# Altium PCB ServersBlock.PcbDoc
Units mil, origin at the board's own origin, x right, y up, seen from the top; angles counter-clockwise.
Board outline 6000 x 4000 mil, 2 copper layers (Top Layer, Bottom Layer); 11 components, 13 nets, 84 pads, 0 vias.
Unrouted connection lines stored in the file: 30.
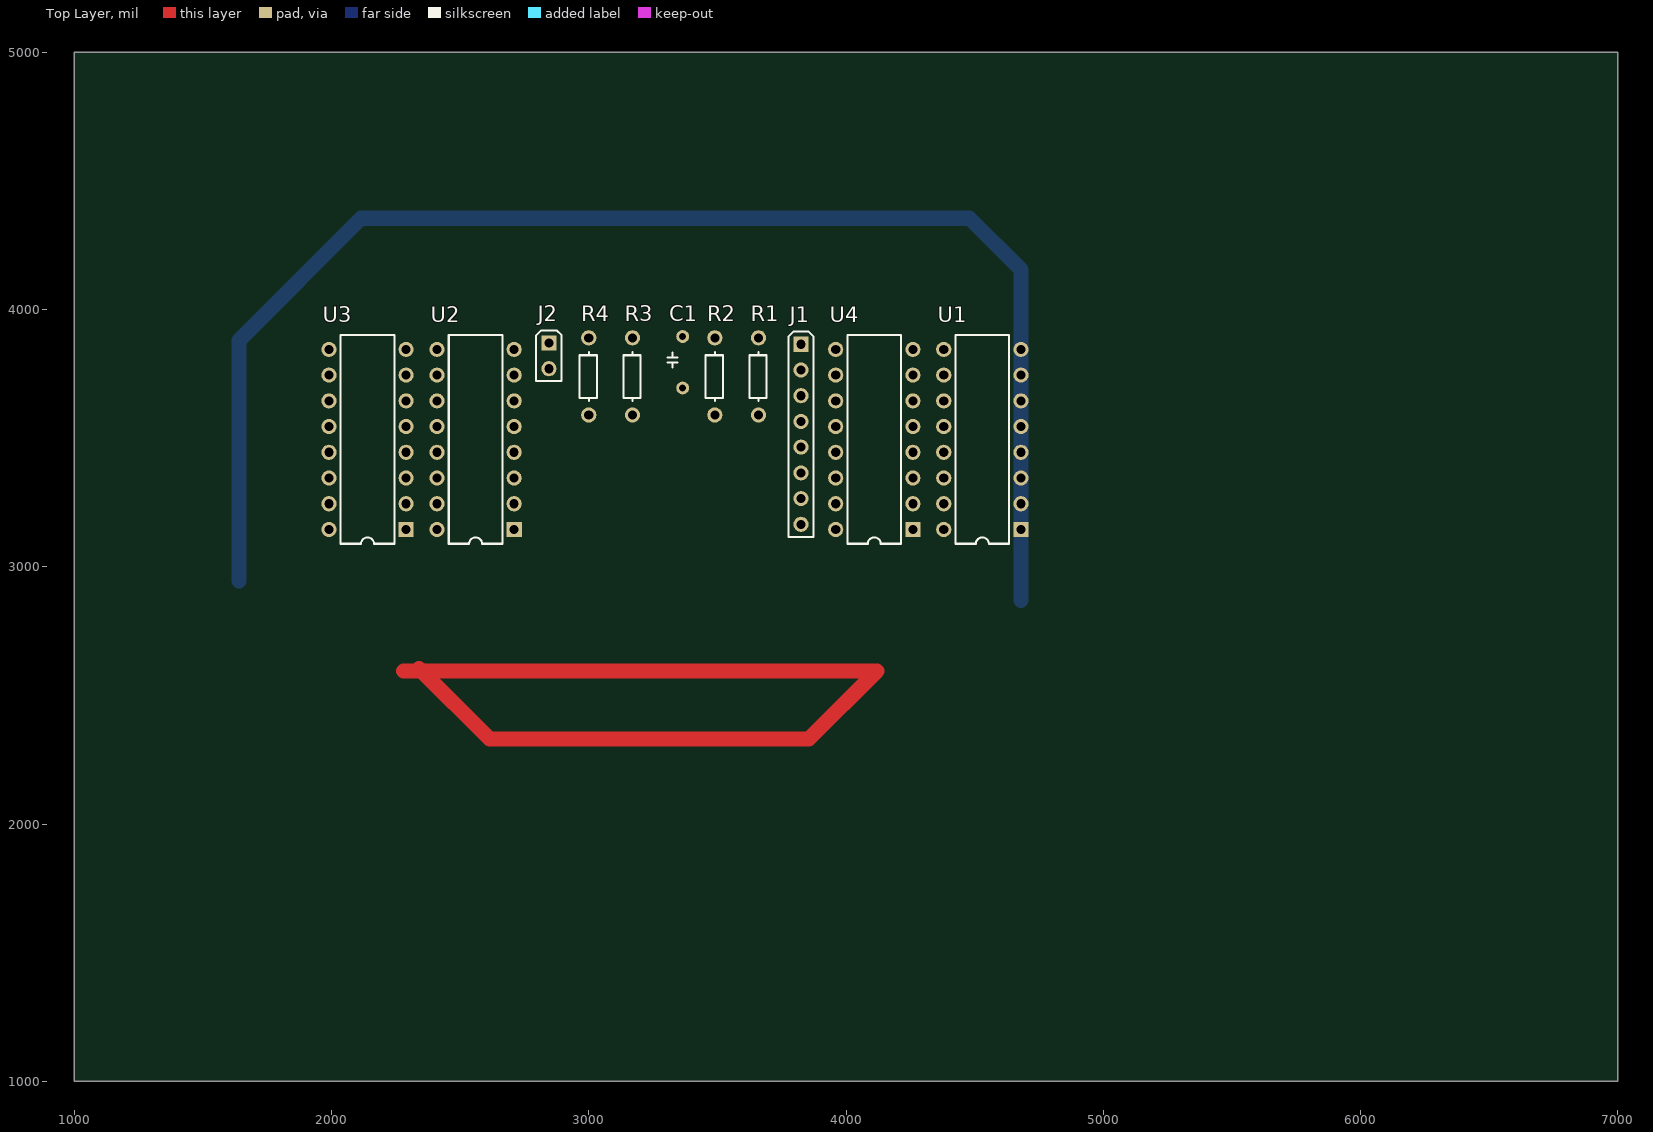
[diagram p0: Top Layer view]
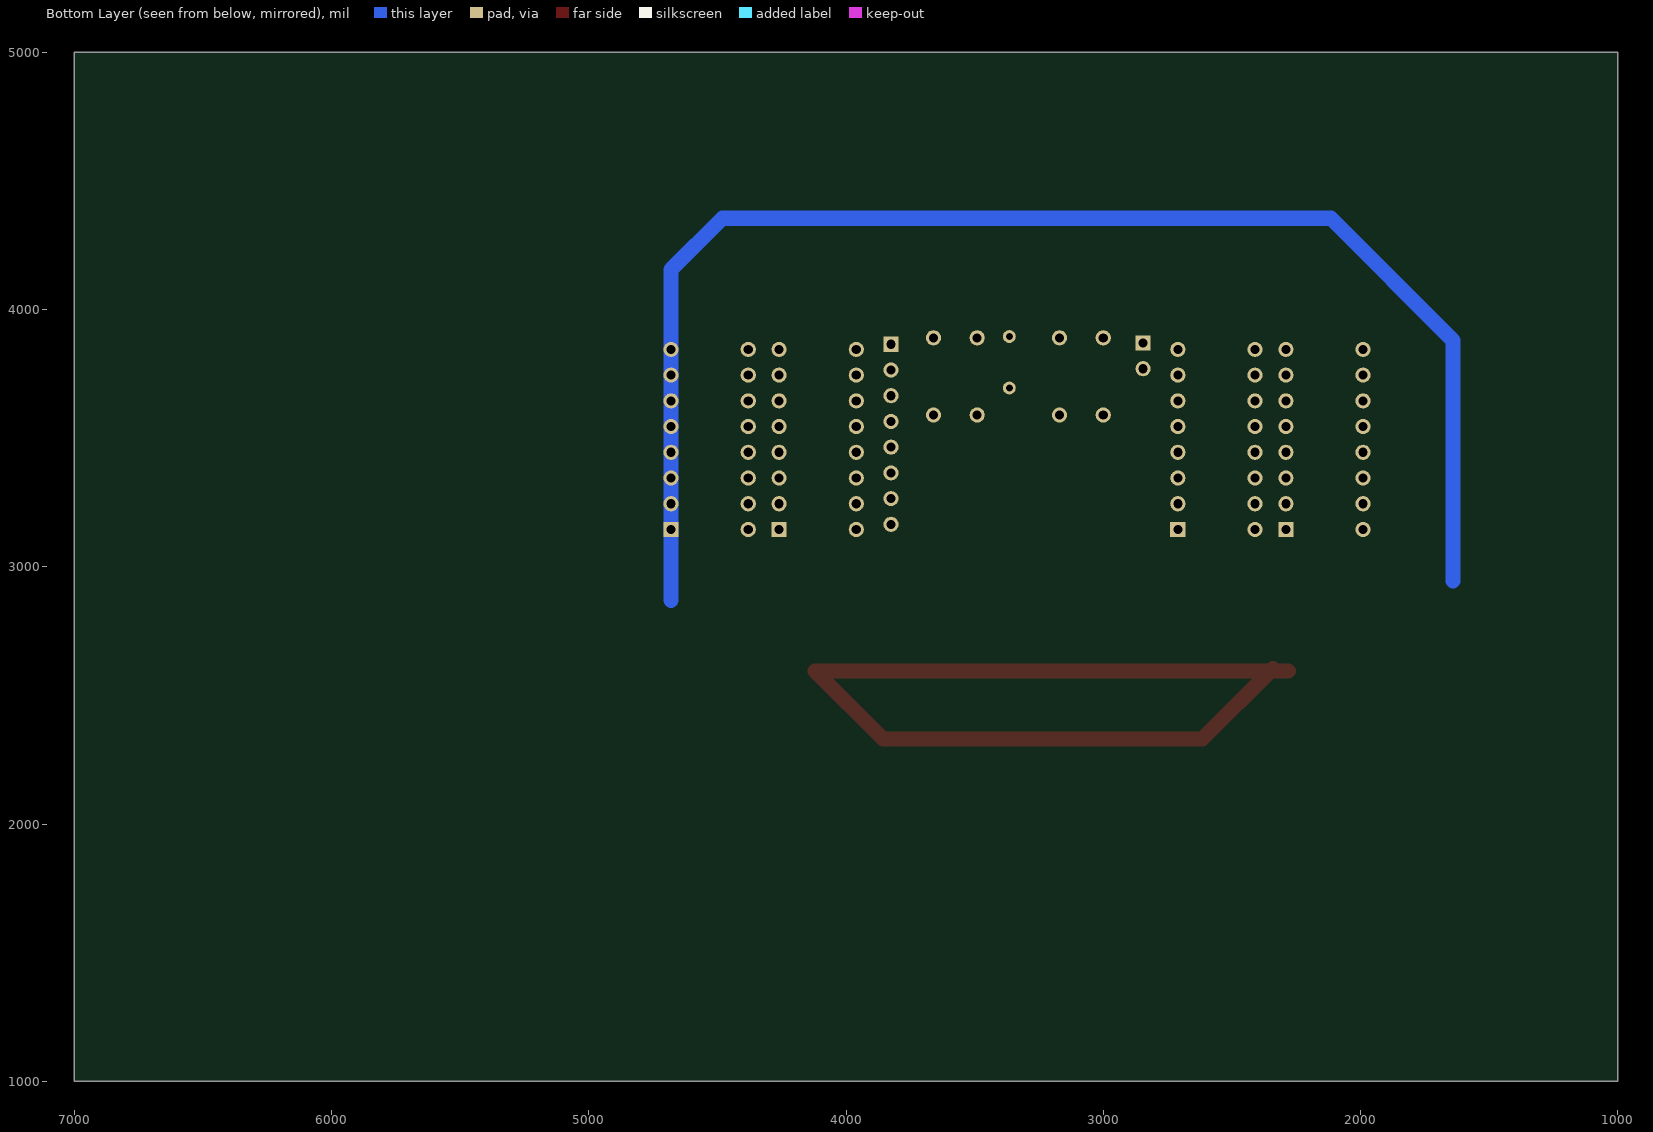
[diagram p1: Bottom Layer view, seen from below]

## Layer stack, top to bottom
Top Solder: solder mask 0.4, Solder Resist, Dk 3.5
Top Layer: signal copper 1.4
Dielectric 1: dielectric 12.6, FR-4, Dk 4.8
Bottom Layer: signal copper 1.4
Bottom Solder: solder mask 0.4, Solder Resist, Dk 3.5

## Board outline
1000,1000 7000,1000 7000,5000 1000,5000

## Design rules (kind name [scope] priority, off if disabled: settings)
Clearance [All] p1: gap=10
PolygonConnect [All] p1: connectstyle=Relief reliefconductorwidth=10 reliefentries=4 polygonreliefangle="90 Angle" airgapwidth=10
RoomDefinition MainBlock [InComponentClass('MainBlock')] p1: confinementstyle=ConfineIn formatcopy=TRUE lockcomponents=FALSE outline 0,0 2000,0 2000,1000 0,1000
RoutingVias [All] p1: holewidth=28 width=50 viastyle="Through Hole" minholewidth=28 minwidth=50 maxholewidth=28 maxwidth=50
SolderMaskExpansion [All] p1: expansion=4
Width [All] p1: maxlimit=10 minlimit=10 preferedwidth=10
29 further rules are at their usual default settings.

## Components (designator, comment, footprint, x,y, rotation, side; value= is the part's Value field where it differs from the comment)
C1 "0.01mF" "Cap (3p)" 3365,3695 r90 top
J1 "Connector" "Line 2.54 x 8" 3825,3865 r0 top
J2 "Connector" "Line 2.54 x 2" 2845,3870 r0 top
R1 "330 Om" "Res p7.62 (4p)" 3660,3590 r90 top
R2 "330 Om" "Res p7.62 (4p)" 3490,3590 r90 top
R3 "330 Om" "Res p7.62 (4p)" 3170,3590 r90 top
R4 "330 Om" "Res p7.62 (4p)" 3000,3590 r90 top
U1 "SN74HC595N" DIP16 4680,3145 r90 top
U2 "SN74HC595N" DIP16 2710,3145 r90 top
U3 "SN74HC595N" DIP16 2290,3145 r90 top
U4 "Optocouplier" DIP16 4260,3145 r90 top

## Footprints (in the part's own frame and the unit in brackets; to place one, negate y for a bottom-side part, rotate by r counter-clockwise, add the part's x,y. Pads: shape width x height; smd on the part's side, far side on the other; paste and mask are expansions set on the pad)
"Cap (3p)" [mm]
  round 1.27 hole 0.7: 1(0,0) 2(5.08,0)
  silkscreen extent 2,0.5 3.5,1.5
DIP16 [mm] "DIP; 16 Leads; Row Spacing 7.62 mm; Pitch 2.54 mm"
  rect 1.5x1.5 hole 0.9: 1(0,0)
  round 1.5 hole 0.9: 2(2.54,0) 3(5.08,0) 4(7.62,0) 5(10.16,0) 6(12.7,0) 7(15.24,0) 8(17.78,0) 9(17.78,7.62) 10(15.24,7.62) 11(12.7,7.62) 12(10.16,7.62) 13(7.62,7.62) 14(5.08,7.62) 15(2.54,7.62) 16(0,7.62)
  silkscreen extent -1.41,1.16 19.19,6.46, body extent -1.87,-0.05 19.72,7.83, height 4.19
"Line 2.54 x 2" [mm]
  rect 1.5x1.5 hole 0.9: 1(0,0)
  round 1.5 hole 0.9: 2(0,-2.54)
  silkscreen extent -1.25,-3.75 1.25,1.25, body extent -1.25,-3.69 1.25,1.39, height 8.3
"Line 2.54 x 8" [mm]
  rect 1.5x1.5 hole 0.9: 1(0,0)
  round 1.5 hole 0.9: 2(0,-2.54) 3(0,-5.08) 4(0,-7.62) 5(0,-10.16) 6(0,-12.7) 7(0,-15.24) 8(0,-17.78)
  silkscreen extent -1.25,-19.05 1.25,1.25, body extent -1.25,-18.91 1.25,1.41, height 8.4
"Res p7.62 (4p)" [mm] "L p7.62; horisontal"
  round 1.5 hole 0.9: 1(0,0) 2(7.62,0)
  silkscreen extent 1.4,-0.8 6.2,0.9, body extent -0.3,-1 7.8,1, height 2.1

## Part data
C1: library part Cap, "Capacitor"
J1: library part "Connector ( 8 pin )", "8pin Connector"
J2: library part "Connector ( 2 pin )", "8pin Connector"
R1 R2 R3 R4: library part Resistor
U1 U2 U3: "8-Bit Shift Register with 3-State Output Registers"
U4: library part "Optocouplier 4x", "4x channel"

## Nets (pads, with @x,y where several pads share a name; then routed paths per layer and width w, separated by ;. In a path a pad name is that pad's centre, name@x,y a point inside that pad or via, vN(x,y) a via of type N, cw(c..) or ccw(c..) an arc to the next point about the centre after c; other vN are vias at no path point)
"CLK 595": J1.7 U1.11 U2.11 U3.11
"DATA 595": J1.5 U1.14
"DATA 595-2": U1.9 U2.14
"DATA 595-3": U2.9 U3.14
GND: C1.1 J2.1 U1.8 U1.13 U2.8 U2.13 U3.8 U3.13
"LATCH 595": C1.2 J1.6 U1.12 U2.12 U3.12
"MR 595": J1.8 U1.10 U2.10 U3.10
NetR1_1: R1.1 R2.1 R3.1 R4.1
NetR1_2: R1.2 U4.2
NetR2_2: R2.2 U4.4
NetR3_2: R3.2 U4.6
NetR4_2: R4.2 U4.8
VCC: J2.2 U1.16 U2.16 U3.16
pads on no net: J1.1 J1.2 J1.3 J1.4 U1.1 U1.2 U1.3 U1.4 U1.5 U1.6 U1.7 U1.15 U2.1 U2.2 U2.3 U2.4 U2.5 U2.6 U2.7 U2.15 U3.1 U3.2 U3.3 U3.4 U3.5 U3.6 U3.7 U3.9 U3.15 U4.1 U4.3 U4.5 U4.7 U4.9 U4.10 U4.11 U4.12 U4.13 U4.14 U4.15 U4.16
copper on no net: | length 9383.3
  Top Layer w59.06: 2280,2595 4120,2595 3855,2330 2615,2330 2340,2605
  Bottom Layer w59.06: 1640,2945 1640,3880 2115,4355 4480,4355 4680,4155 4680,2870